# Altium PCB Motherboard.PcbDoc
Units mil, origin at the board's own origin, x right, y up, seen from the top; angles counter-clockwise.
Board outline 2045 x 1460 mil, 2 copper layers (Top Layer, Bottom Layer); 16 components, 22 nets, 80 pads, 13 vias.
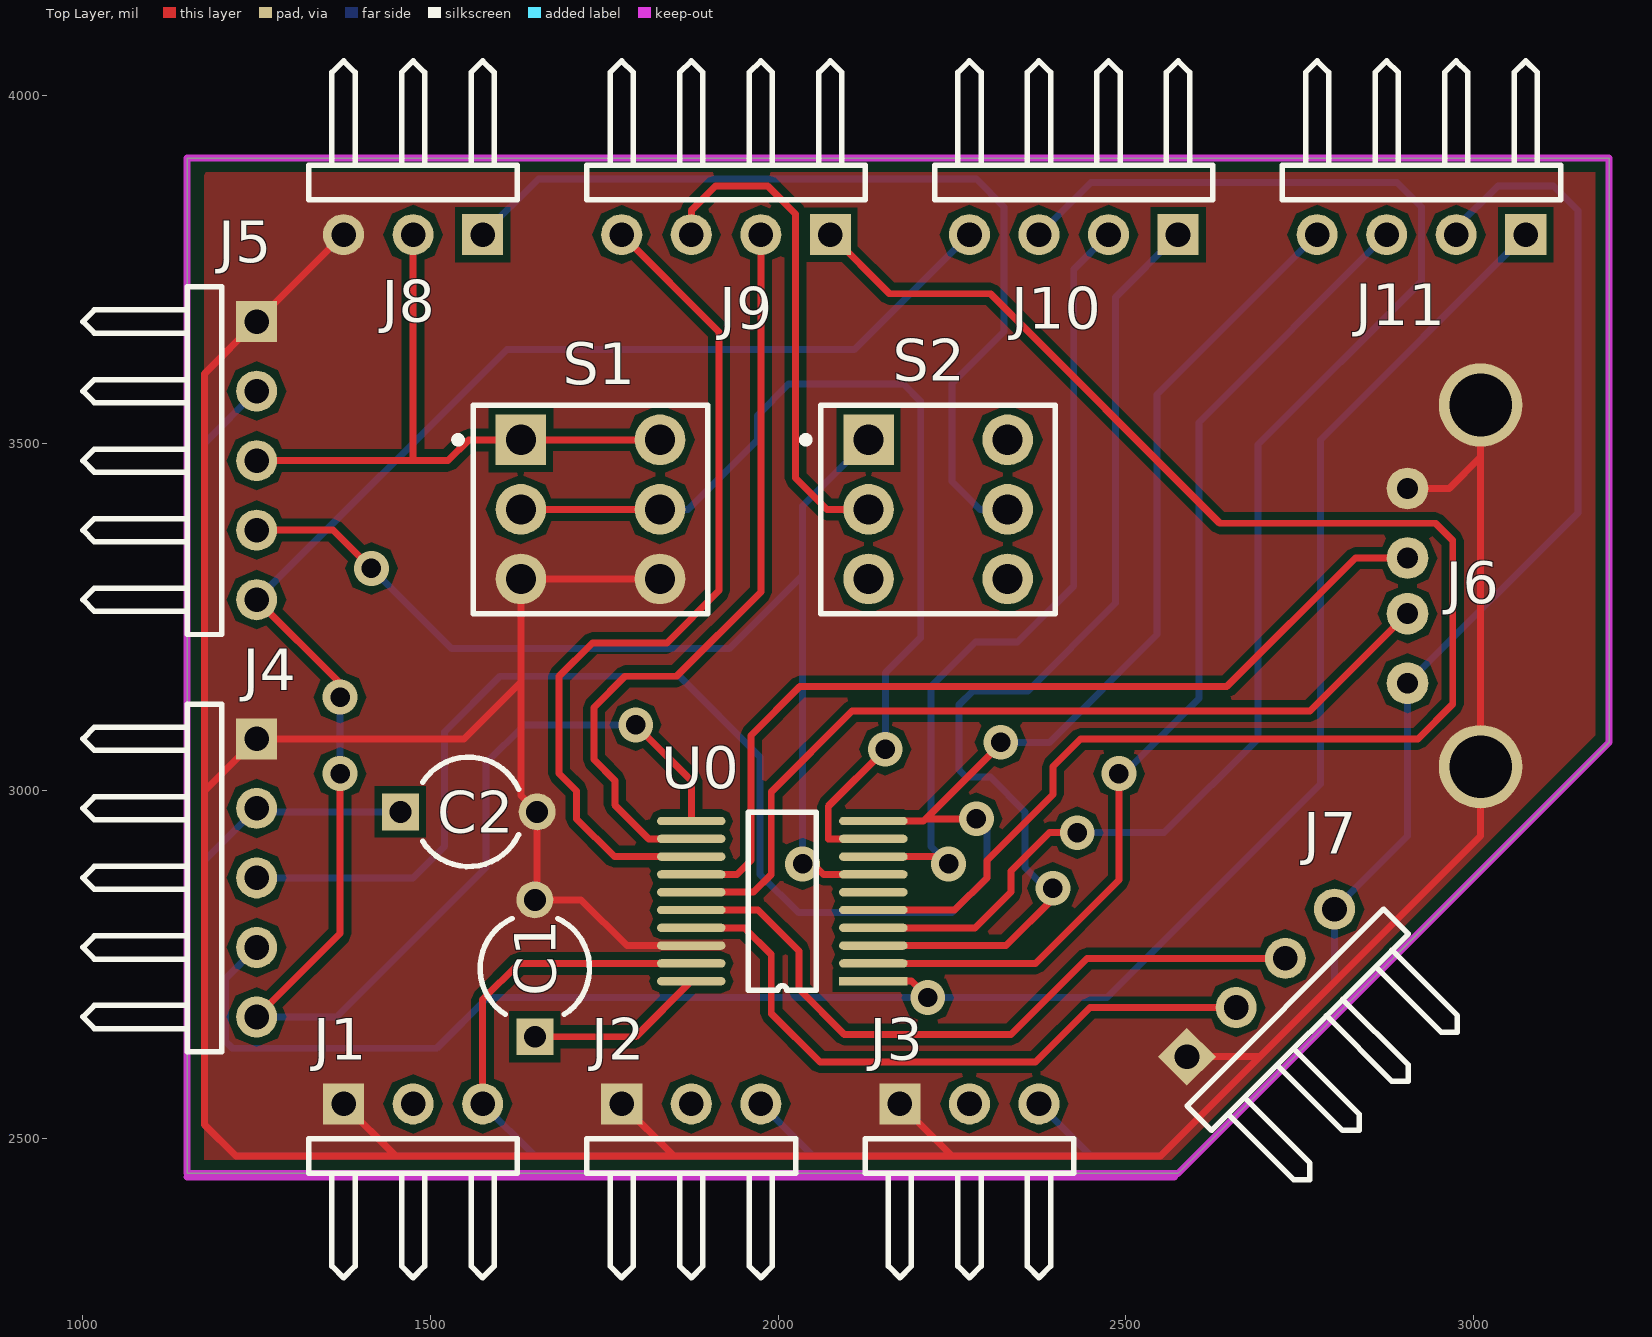
[diagram p0: Top Layer view]
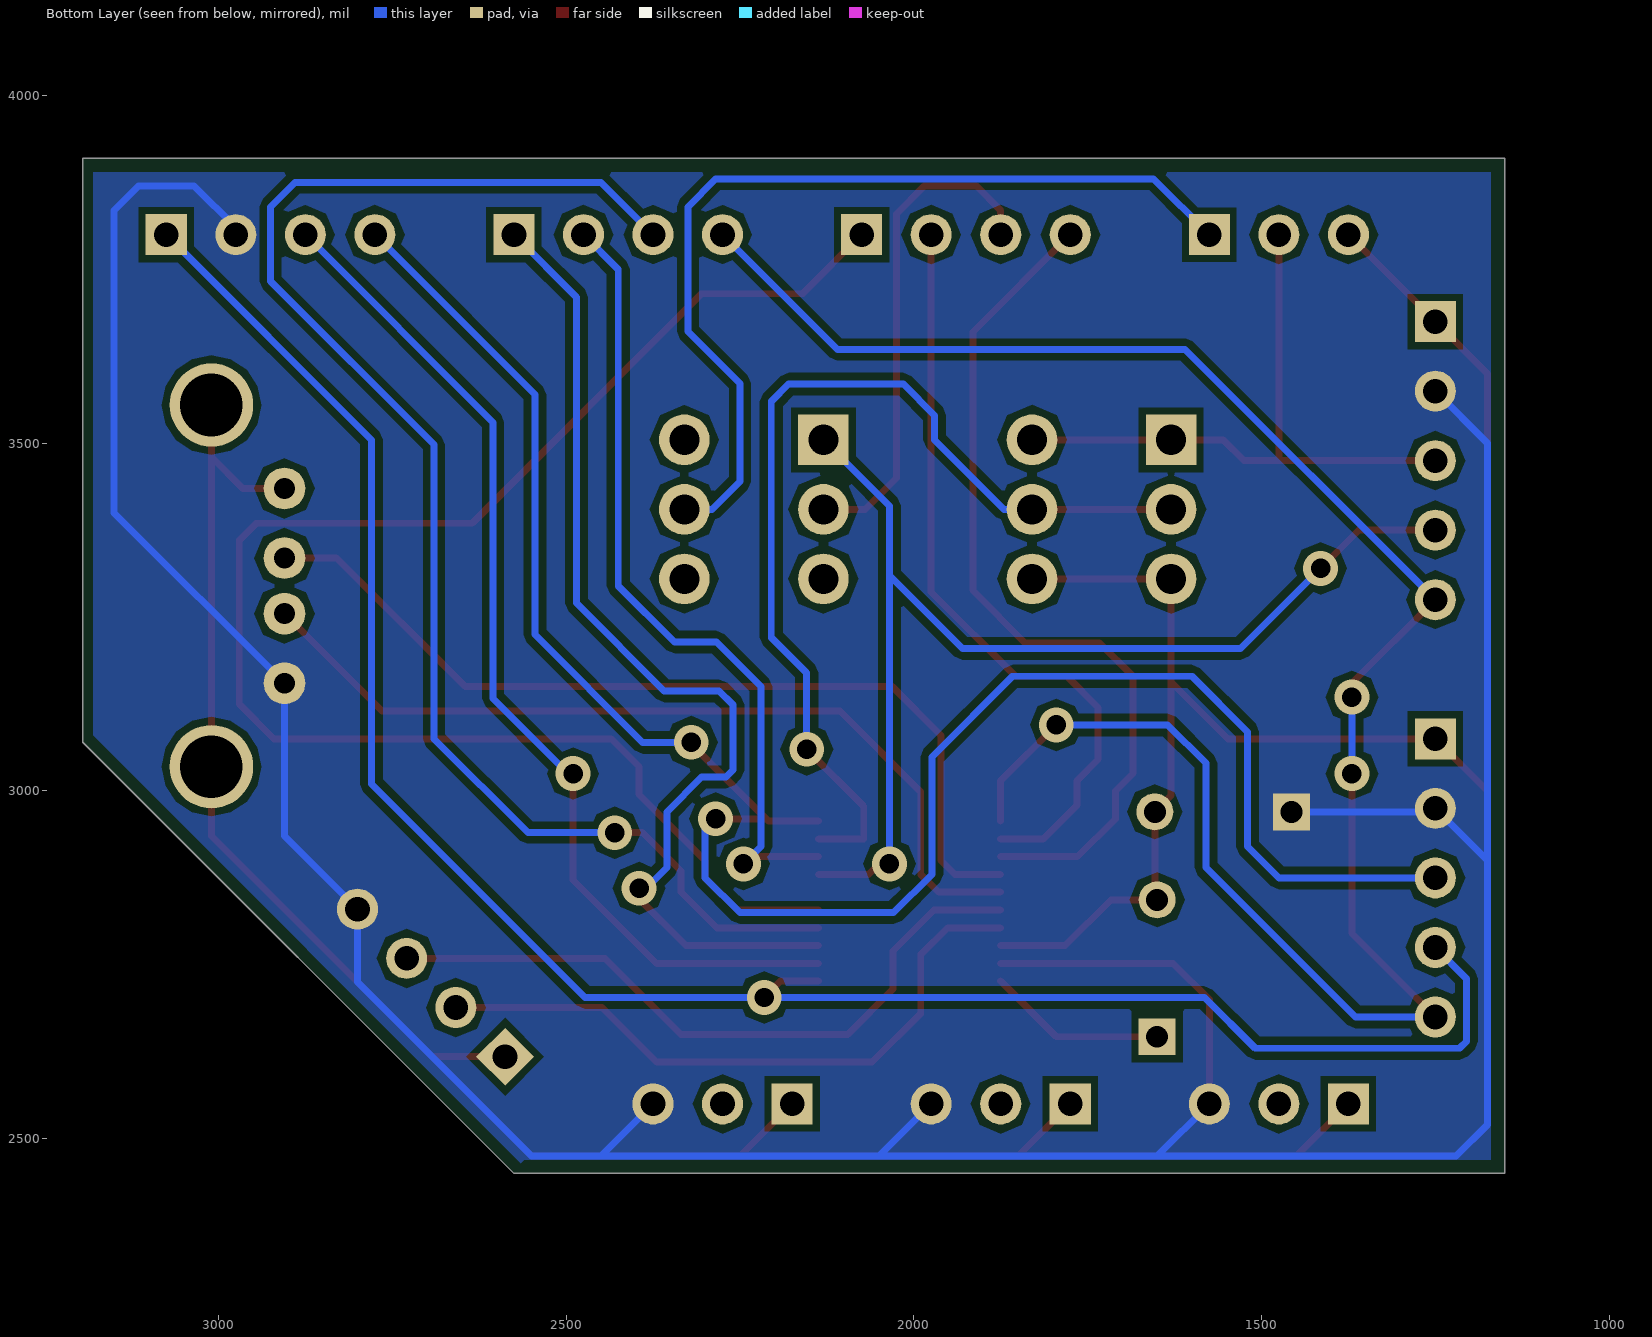
[diagram p1: Bottom Layer view, seen from below]

## Layer stack, top to bottom
Top Solder: solder mask 0.4, Solder Resist, Dk 3.5
Top Layer: signal copper 1.4
Dielectric 1: dielectric 12.6, FR-4, Dk 4.8
Bottom Layer: signal copper 1.4
Bottom Solder: solder mask 0.4, Solder Resist, Dk 3.5

## Board outline
1150,2450 2575,2450 3195,3070 3195,3910 1150,3910

## Design rules (kind name [scope] priority, off if disabled: settings)
Clearance [All] p1: gap=10 ignorepadtopadclearanceinfootprint=FALSE except(0: Arc-Hole Track-Hole SMDPad-Hole THPad-Hole Via-Hole Fill-Hole Poly-Hole Region-Hole Text-Hole)
PolygonConnect PolygonConnect_2 [All vs IsNamedPolygon('NETC2_1_L02_P000')] p1: connectstyle=Direct reliefconductorwidth=10 reliefentries=4 polygonreliefangle="90 Angle" airgapwidth=10
PolygonConnect PolygonConnect_1 [All vs IsNamedPolygon('NETC1_2_L01_P002')] p2: connectstyle=Direct reliefconductorwidth=10 reliefentries=4 polygonreliefangle="90 Angle" airgapwidth=10
PolygonConnect [All] p3: connectstyle=Relief reliefconductorwidth=10 reliefentries=4 polygonreliefangle="90 Angle" airgapwidth=10
RoutingVias [All] p1: holewidth=28 width=50 viastyle="Through Hole" minholewidth=28 minwidth=50 maxholewidth=28 maxwidth=50
SolderMaskExpansion [All] p1: expansion=4
Width [All] p1: maxlimit=10 minlimit=10 preferedwidth=10
30 further rules are at their usual default settings.

## Components (designator, comment, footprint, x,y, rotation, side; value= is the part's Value field where it differs from the comment)
C1 "Cap2" CAPR5-4X5 1650,2745 r90 top value=4.7uF
C2 "Cap2" CAPR5-4X5 1555,2970 r0 top value=0.47uF
J1 "POWER" HDR1X3H 1375,2550 r0 top
J2 "VIDEO" HDR1X3H 1775,2550 r0 top
J3 "AUDIO" HDR1X3H 2175,2550 r0 top
J4 "Joystick2" HDR1X5H 1250,3075 r270 top
J5 "Joystick1" HDR1X5H 1250,3675 r270 top
J6 "USB_TypeA_Female" USB_TypeA_Female 2905,3155 r90 top
J7 "I2C" HDR1X4H 2587.87,2617.87 r45 top
J8 "EXP" HDR1X3H 1575,3800 r180 top
J9 "EXP" HDR1X4H 2075,3800 r180 top
J10 "EXP" HDR1X4H 2575,3800 r180 top
J11 "EXP" HDR1X4H 3075,3800 r180 top
S1 "Download" DPDT-6 1730,3405 r0 top
S2 "Standard/1PExt" DPDT-6 2230,3405 r0 top
U0 "CH559" SSOP20 2136.81,2726.46 r180 top

## Footprints (in the part's own frame and the unit in brackets; to place one, negate y for a bottom-side part, rotate by r counter-clockwise, add the part's x,y. Pads: shape width x height; smd on the part's side, far side on the other; paste and mask are expansions set on the pad)
CAPR5-4X5 [mm] "Capacitor; 2 Leads"
  rect 1.35x1.35 hole 0.8: 1(-2.5,0)
  round 1.35 hole 0.8: 2(2.5,0)
  silkscreen extent -1.69,-2 1.82,2
DPDT-6 [mm] "Switch; 6 Leads"
  rect 1.85x1.85 hole 1.1: 1(-2.54,2.54)
  round 1.85 hole 1.1: 2(-2.54,0) 3(-2.54,-2.54) 4(2.54,-2.54) 5(2.54,0) 6(2.54,2.54)
  silkscreen extent -4.96,-3.81 4.28,3.81
HDR1X3H [mm] "Connector; Header; 3 Position; Right Angle"
  rect 1.5x1.5 hole 0.9: 1(0,0)
  round 1.5 hole 0.9: 2(2.54,0) 3(5.08,0)
  silkscreen extent -1.27,-6.35 6.35,-1.27
HDR1X4H [mm] "Connector; Header; 4 Position; Right Angle"
  rect 1.5x1.5 hole 0.9: 1(0,0)
  round 1.5 hole 0.9: 2(2.54,0) 3(5.08,0) 4(7.62,0)
  silkscreen extent -1.27,-6.35 8.89,-1.27
HDR1X5H [mm] "Connector; Header; 5 Position; Right Angle"
  rect 1.5x1.5 hole 0.9: 1(0,0)
  round 1.5 hole 0.9: 2(2.54,0) 3(5.08,0) 4(7.62,0) 5(10.16,0)
  silkscreen extent -1.27,-6.35 11.43,-1.27
SSOP20 [mm]
  rect 2.5x0.305 smd: 1(0,0)
  oval 2.5x0.305 smd: 2(0,-0.65) 3(0,-1.3) 4(0,-1.95) 5(0,-2.6) 6(0,-3.25) 7(0,-3.9) 8(0,-4.55) 9(0,-5.2) 10(0,-5.85) 11(6.65,-5.85) 12(6.65,-5.2) 13(6.65,-4.55) 14(6.65,-3.9) 15(6.65,-3.25) 16(6.65,-2.6) 17(6.65,-1.95) 18(6.65,-1.3) 19(6.65,-0.65) 20(6.65,0)
  silkscreen extent 2.09,-6.18 4.57,0.33
USB_TypeA_Female [mil]
  round 60 hole 30: 1(0,0) 2(100,0) 3(180,0) 4(280,0)
  round 120 hole 90: 5(-120,-105) 6(400,-105)

## Part data
C1 C2: "Capacitor", PackageDescription="Capacitor; 2 Leads", PackageReference=CAPR5-4X5, Published=23-Sep-2002, Publisher="Altium Limited"
J1 J2 J3 J8: library part "Header 3H", "Header, 3-Pin, Right Angle", LatestRevisionDate=17-Jul-2002, LatestRevisionNote="Re-released for DXP Platform.", Publisher="Altium Limited"
J4 J5: library part "Header 5H", "Header, 5-Pin, Right Angle", LatestRevisionDate=17-Jul-2002, LatestRevisionNote="Re-released for DXP Platform.", Publisher="Altium Limited"
J7 J9 J10 J11: library part "Header 4H", "Header, 4-Pin, Right Angle", LatestRevisionDate=17-Jul-2002, LatestRevisionNote="Re-released for DXP Platform.", Publisher="Altium Limited"
S1 S2: library part SW-DPDT, "Double-Pole, Double-Throw Switch", LatestRevisionDate=17-Jul-2002, LatestRevisionNote="Re-released for DXP Platform.", PackageDescription="Switch; 6 Leads", PackageReference=DPDT-6, Published=24-Mar-1999, Publisher="Altium Limited"

## Via types
v1: diameter 50, hole 28, Top Layer to Bottom Layer, 13 vias

## Nets (pads, with @x,y where several pads share a name; then routed paths per layer and width w, separated by ;. In a path a pad name is that pad's centre, name@x,y a point inside that pad or via, vN(x,y) a via of type N, cw(c..) or ccw(c..) an arc to the next point about the centre after c; other vN are vias at no path point)
NetC1_1: C1.1 U0.20 | length 258.1
  Top Layer w10: C1.1 1795.12,2646.57 U0.20
NetC1_2: C1.2 C2.2 J1.1 J2.1 J3.1 J4.1 J5.1 J6.4 J6.5 J6.6 J7.1 J8.3 S1.3 S1.4 U0.18 | length 6018.7
  Top Layer w10: J1.1 1450,2475 ; J8.3 J5.1 1175,3600 1175,3000 ; J2.1 1850,2475 ; S1.4 S1.3 1630,3156.57 ; U0.18 1782.36,2777.64 1716.57,2843.43 C1.2 1653.43,2846.85 C2.2 1630,2993.43 1630,3156.57 ; J3.1 2250,2475 ; J7.1 2692.87,2617.87 ; J6.4 2965,3435 3010,3480 ; J6.6 3010,3480 ; 1175,3000 1175,2520 1220,2475 1450,2475 ; 1175,3000 J4.1 1548.43,3075 1630,3156.57 ; 1450,2475 1850,2475 ; 1850,2475 2250,2475 ; 2250,2475 2550,2475 2692.87,2617.87 ; 2692.87,2617.87 3010,2935 J6.5 3010,3480
NetC2_1: C2.1 J1.3 J2.3 J3.3 J4.2 J5.2 J6.1 J7.4 J11.2 U0.19 | length 5417.1
  Top Layer w10: J1.3 1575,2700 1627.05,2752.05 U0.19
  Bottom Layer w10: J5.2 1175,3500 1175,2900 ; C2.1 1255,2970 J4.2 1175,2900 ; J1.3 1650,2475 ; J2.3 2050,2475 ; J3.3 2450,2475 ; J11.2 2975,3810 3035,3870 3115,3870 3150,3835 3150,3400 J6.1 2905,2935 J7.4 2800,2725 2550,2475 2450,2475 ; 1175,2900 1175,2520 1220,2475 1650,2475 ; 1650,2475 2050,2475 ; 2050,2475 2450,2475
NetJ4_3: J4.3 J11.4 U0.10 | length 2882.2
  Top Layer w10: U0.10 2209,2956.77 2212.23,2960 ; v1(2285,2960) 2212.23,2960 ; v1(2320,3070) 2320,3067.77 2212.23,2960
  Bottom Layer w10: J4.3 1475,2875 1520,2920 1520,3085 1600,3165 1858,3165 1974,3049 1974,2880 2029,2825 2250,2825 2300,2875 2300,2945 v1(2285,2960) ; v1(2320,3070) 2390,3070 2545,3225 2545,3570 J11.4
NetJ4_4: J4.4 J11.1 U0.1 | length 2890.3
  Top Layer w10: U0.1 2191.54,2726.46 v1(2215,2703)
  Bottom Layer w10: J4.4 1205,2730 1205,2640 1215,2630 1509,2630 1582,2703 v1(2215,2703) 2473,2703 2780,3010 2780,3505 J11.1
NetJ4_5: J4.5 J5.5 J10.4 U0.11 | length 2948.5
  Top Layer w10: J4.5 1370,2795 v1(1370,3025) ; J5.5 1370,3155 v1(1370,3135) ; U0.11 1875,3015 v1(1795,3095) ; v1(1795,3095) 1789.11,3100.89 1783.23,3095 v1(1795,3095)
  Bottom Layer w10: J4.5 1365,2675 1580,2890 1580,3040 1635,3095 v1(1795,3095) ; J5.5 1610,3635 2110,3635 J10.4 ; v1(1370,3025) v1(1370,3135)
NetJ5_3: J5.3 J8.2 S1.1 S1.6 | length 917.4
  Top Layer w10: J5.3 1475,3475 ; J8.2 1475,3475 ; S1.6 S1.1 1555,3505 1525,3475 1475,3475
NetJ5_4: J5.4 S2.1 U0.7 | length 1656.3
  Top Layer w10: J5.4 1360,3375 v1(1415,3320) ; v1(2035,2895) 2050,2895 2065,2880 U0.7
  Bottom Layer w10: v1(1415,3320) 1530,3205 1930,3205 2035,3310 ; v1(2035,2895) 2035,3310 ; S2.1 2035,3410 2035,3310
NetJ6_2: J6.2 U0.15 | length 1265.5
  Top Layer w10: U0.15 1964.41,2854.41 1990,2880 1990,2998.77 2106.23,3115 2765,3115 J6.2
NetJ6_3: J6.3 U0.14 | length 1323.9
  Top Layer w10: U0.14 1941,2880 1961,2900 1961,3080 2031,3150 2645,3150 2830,3335 J6.3
NetJ7_2: J7.2 U0.17 | length 946
  Top Layer w10: U0.17 1951.77,2803.23 1990,2765 1990,2680 2060,2610 2370,2610 2448.58,2688.58 J7.2
NetJ7_3: J7.3 U0.16 | length 1005.8
  Top Layer w10: U0.16 1971.18,2828.82 2030,2770 2030,2715 2095,2650 2335,2650 2444.29,2759.29 J7.3
NetJ8_1: J8.1 S2.5 | length 1322.3
  Bottom Layer w10: J8.1 1655,3880 2285,3880 2325,3840 2325,3661 2250,3586 2250,3445 2290,3405 S2.5
NetJ9_1: J9.1 U0.5 | length 2306.2
  Top Layer w10: J9.1 2160,3715 2305,3715 2635,3385 2945,3385 2970,3360 2970,3125 2920,3075 2435,3075 2395,3035 2395,2995 2300,2900 2300,2875 2253.82,2828.82 U0.5
NetJ9_2: J9.2 U0.12 | length 1105.4
  Top Layer w10: U0.12 1813.82,2931.18 1765,2980 1765,3015 1735,3045 1735,3120 1780,3165 1854,3165 1975,3286 J9.2
NetJ9_3: J9.3 S2.2 | length 719.7
  Top Layer w10: J9.3 1875,3835 1910,3870 1985,3870 2025,3830 2025,3450 2070,3405 S2.2
NetJ9_4: J9.4 U0.13 | length 1253.8
  Top Layer w10: J9.4 1915,3660 1915,3287.97 1840,3212.97 1732.97,3212.97 1685,3165 1685,3025 1710,3000 1710,2960 1764.41,2905.59 U0.13
NetJ10_1: J10.1 U0.3 | length 1511.5
  Top Layer w10: U0.3 2327.64,2777.64 2395,2845 v1(2395,2860)
  Bottom Layer w10: v1@2385,2848.64 v1@2385,2860 ; v1(2395,2860) v1@2385,2860 ; J10.1 2485,3710 2485,3270 2359.03,3144.03 2280,3144.03 2260,3124.03 2260,3030 2270,3020 2305,3020 2355,2970 2355,2890 v1@2385,2860
NetJ10_2: J10.2 U0.8 | length 1168.7
  Top Layer w10: U0.8 2234.41,2905.59 v1(2245,2895)
  Bottom Layer w10: v1(2245,2895) 2220,2920 2220,3150 2284,3214 2344,3214 2425,3295 2425,3750 J10.2
NetJ10_3: J10.3 U0.4 | length 2141.2
  Top Layer w10: U0.4 2283.23,2803.23 2335,2855 2335,2885 2390,2940 v1(2430,2940)
  Bottom Layer w10: J10.3 2450,3875 2890,3875 2925,3840 2925,3733 2690,3498 2690,3075 2555,2940 v1(2430,2940)
NetJ11_3: J11.3 U0.2 | length 1504.3
  Top Layer w10: U0.2 2370.05,2752.05 2490,2872 v1(2490,3025)
  Bottom Layer w10: v1(2490,3025) 2490,3018 2605,3133 2605,3530 J11.3
NetS1_1: S1.2 S1.5 U0.9 | length 1429.1
  Top Layer w10: S1.2 S1.5 ; U0.9 2072,2931.18 2072,2978 v1(2154,3060)
  Bottom Layer w10: S1.5 1870,3405 1970,3505 1970,3540 2015,3585 2180,3585 2205,3560 2205,3221 2154,3170 v1(2154,3060)
pads on no net: J1.2 J2.2 J3.2 S2.3 S2.4 S2.6 U0.6

## Polygon pours and split planes (outlines as drawn)
NetC2_1 on Bottom Layer "NETC2_1_L02_P000" (solid, pour order 0): 1170,3890 1170,2470 2560,2470 2565,2465 3180,3080 3180,3890
NetC1_2 on Top Layer "NETC1_2_L01_P002" (solid, pour order 2): 1170,3890 1175,3885 1175,2470 2565,2470 3175,3080 3175,3890

## Keep-outs
Top Layer:
  lines w10: 1150,2445 2570,2445 ; 3195,3070 2575,2450 1150,2450 1150,3910 3195,3910 ; 3195,3070 3195,3910 ; 3195,3070 3195,3910